# Altium PCB HBridge PCB.PcbDoc
Units mm, origin at the board's own origin, x right, y up, seen from the top; angles counter-clockwise.
Board outline 44.5 x 25.75 mm, 2 copper layers (Top Layer, Bottom Layer), stack 1.621 mm thick; 25 components, 19 nets, 79 pads, 45 vias.
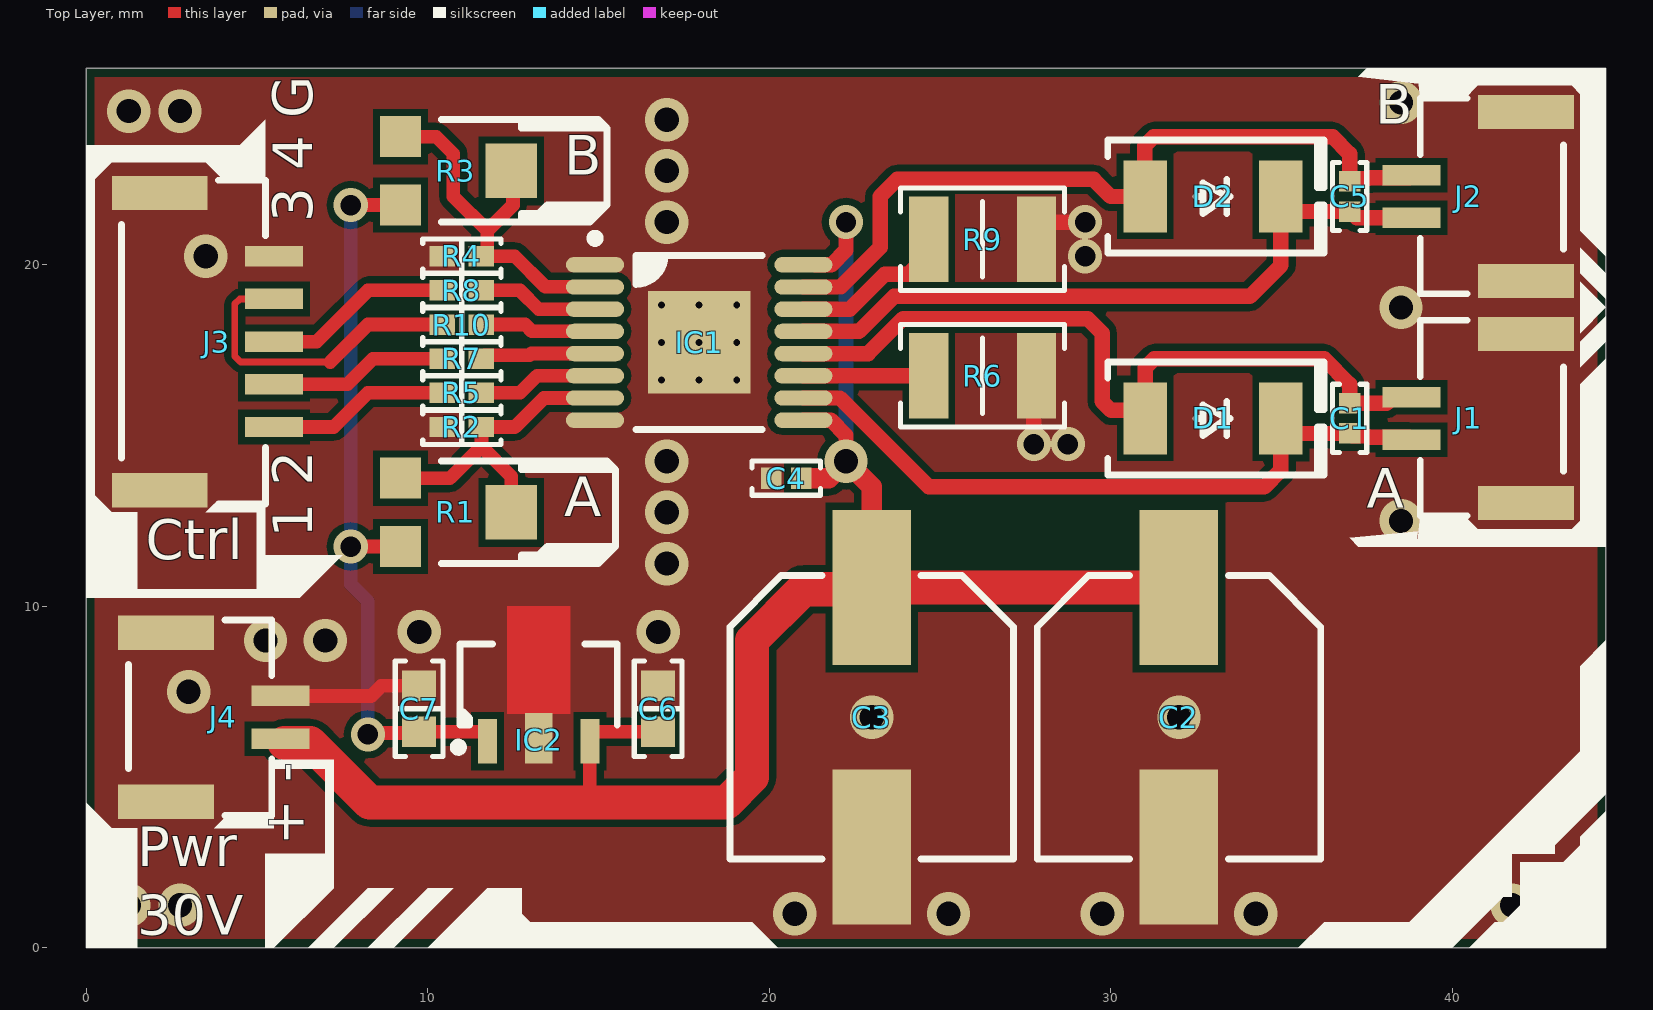
[diagram p0: Top Layer view]
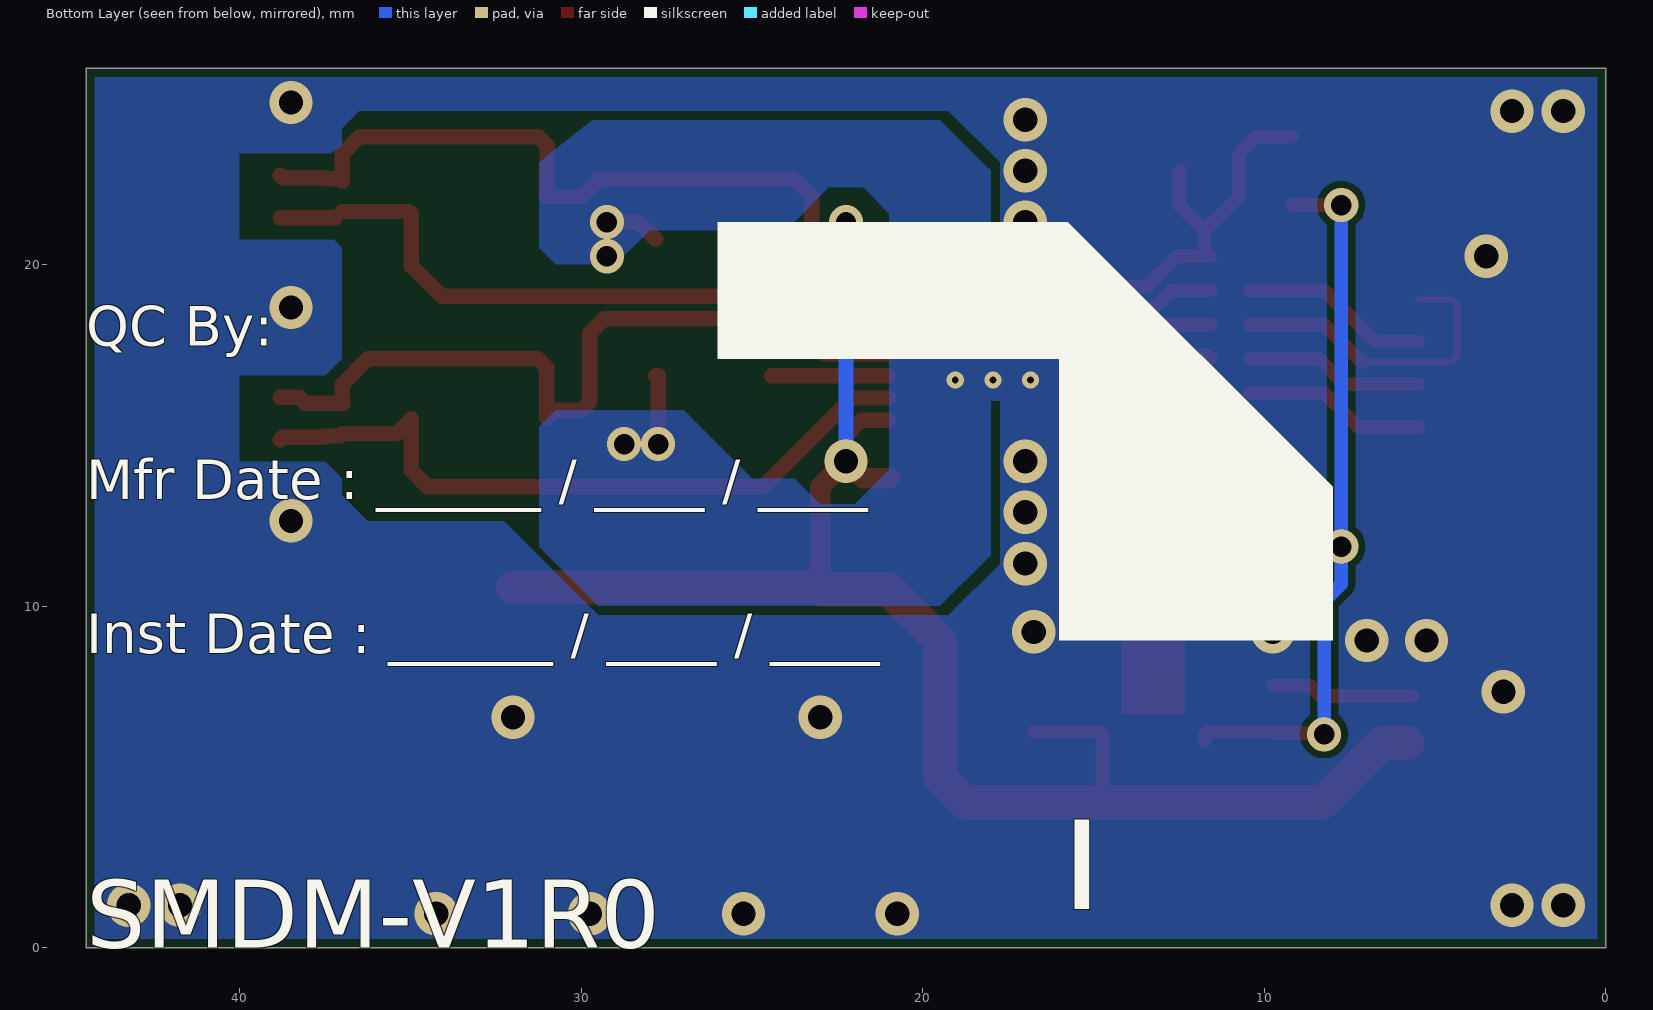
[diagram p1: Bottom Layer view, seen from below]

## Layer stack, top to bottom
Top Solder: solder mask 0.0102, Solder Resist, Dk 3.5
Top Layer: signal copper 0.0356
Dielectric1: core 1.55, FR-4, Dk 4.8
Bottom Layer: signal copper 0.0356
Bottom Solder: solder mask 0.0102, Solder Resist, Dk 3.5

## Board outline
0,0 44.5,0 44.5,25.75 0,25.75

## Design rules (kind name [scope] priority, off if disabled: settings)
BoardOutlineClearance [All] p1: gap=0.254 ignorepadtopadclearanceinfootprint=FALSE except(0: Arc-SplitContinuation Track-SplitContinuation SMDPad-SplitContinuation THPad-SplitContinuation Via-SplitContinuation Fill-SplitContinuation Poly-SplitContinuation Region-SplitContinuation Text-SplitContinuation)
Clearance PadClearance [IsPad vs IsPad] p1: gap=0.2 ignorepadtopadclearanceinfootprint=FALSE except(0: Arc-Hole Track-Hole SMDPad-Hole THPad-Hole Via-Hole Fill-Hole Poly-Hole Region-Hole Text-Hole)
Clearance [All] p2: gap=0.2 ignorepadtopadclearanceinfootprint=FALSE except(0: Arc-Hole Track-Hole SMDPad-Hole THPad-Hole Via-Hole Fill-Hole Poly-Hole Region-Hole Text-Hole)
HoleSize [All] p1: absolutevalues=TRUE maxlimit=6 minlimit=0.4 maxpercent=80.000 minpercent=20.000
HoleToHoleClearance [All] p1: gap=0.2 allowstackedmicrovias=TRUE
MinimumSolderMaskSliver [All] p1: minsoldermaskwidth=0
PolygonConnect ViaConnect [IsVia] p1: connectstyle=Direct reliefconductorwidth=0.254 reliefentries=4 polygonreliefangle="90 Angle" airgapwidth=0.254
PolygonConnect [All] p2: connectstyle=Direct reliefconductorwidth=0.3 reliefentries=4 polygonreliefangle="90 Angle" airgapwidth=0.254
RoutingVias [All] p1: holewidth=0.6 width=1 viastyle="Through Hole" minholewidth=0.4 minwidth=0.8 maxholewidth=5 maxwidth=6
SilkToSilkClearance [All] p1: silktosilkclearance=0
SilkToSolderMaskClearance SilkscreenOverComponentPads [IsPad] p1: minsilkscreentomaskgap=0.05 clearancetoexposedcopper=TRUE
SolderMaskExpansion "Via Tenting" [IsVia] p1: expansion=-2
SolderMaskExpansion [All] p2: expansion=0.102
Width [All] p1: maxlimit=2 minlimit=0.2 preferedwidth=0.4
25 further rules are at their usual default settings.

## Components (designator, comment, footprint, x,y, rotation, side; value= is the part's Value field where it differs from the comment)
C1 "100nF" "CAP 0402/1005" 37,15.5 r90 top
C2 "100uF" "CAP ALUM 8.3MM" 32,6.75 r270 top
C3 "100uF" "CAP ALUM 8.3MM" 23,6.75 r270 top
C4 "220nF" "CAP 0402/1005" 20.5,13.75 r180 top
C5 "100nF" "CAP 0402/1005" 37,22 r90 top
C6 "1uF" "CAP 0603/1608" 16.75,7 r270 top
C7 "2.2uF" "CAP 0603/1608" 9.75,7 r270 top
D1 "SMAJ36CA" "Bourns DO214AC SMA" 33,15.5 r0 top
D2 "SMAJ36CA" "Bourns DO214AC SMA" 33,22 r0 top
IC1 "Allegro A4954" "ALLEGRO TSSOP-16EP LP" 17.95,17.725 r0 top
IC2 "Diodes Inc AP7381" "DIODES INC SOT-89" 13.25,6.5 r90 top
J1 "BM02B-GHS-TBT(LF)(SN)(N)" "JST BM02B-GHS-TBT" 41.25,15.5 r270 top
J2 "BM02B-GHS-TBT(LF)(SN)(N)" "JST BM02B-GHS-TBT" 41.25,22 r270 top
J3 "BM05B-GHS-TBT(LF)(SN)" "JST BM05B-GHS-TBT" 3.063,17.75 r90 top
J4 "BM02B-PASS-TFT(LF)(SN)" "JST BM02B-GHS-TBT" 3.25,6.75 r90 top
R1 "10kR" "POT BOURNS TRIMPOT TC33X-1" 11,12.75 r270 top
R2 "750R" "RES 0402/1005" 11,15.25 r0 top
R3 "10kR" "POT BOURNS TRIMPOT TC33X-1" 11,22.75 r270 top
R4 "750R" "RES 0402/1005" 11,20.25 r0 top
R5 "33R" "RES 0402/1005" 11,16.25 r0 top
R6 "CSR1206FKR250" "STACKPOLE CSR1210" 26.25,16.75 r0 top
R7 "33R" "RES 0402/1005" 11,17.25 r0 top
R8 "33R" "RES 0402/1005" 11,19.25 r0 top
R9 "CSR1206FKR250" "STACKPOLE CSR1210" 26.25,20.75 r0 top
R10 "33R" "RES 0402/1005" 11,18.25 r0 top

## Footprints (in the part's own frame and the unit in brackets; to place one, negate y for a bottom-side part, rotate by r counter-clockwise, add the part's x,y. Pads: shape width x height; smd on the part's side, far side on the other; paste and mask are expansions set on the pad)
"ALLEGRO TSSOP-16EP LP" [mm] "TSSOP, 16-Leads, Body 5.00x4.40mm, Pitch 0.65mm, Thermal Pad 3.00x3.00mm, IPC Medium Density"
  oval 1.7x0.45 smd: 1(-3.05,2.275) 2(-3.05,1.625) 3(-3.05,0.975) 4(-3.05,0.325) 5(-3.05,-0.325) 6(-3.05,-0.975) 7(-3.05,-1.625) 8(-3.05,-2.275) 9(3.05,-2.275) 10(3.05,-1.625) 11(3.05,-0.975) 12(3.05,-0.325) 13(3.05,0.325) 14(3.05,0.975) 15(3.05,1.625) 16(3.05,2.275)
  rect 3x3 smd: 17(0,0)
  silkscreen extent -3.17,-2.55 1.85,3.17, body extent -3.21,-2.5 3.21,2.5, height 1.2
"Bourns DO214AC SMA" [mm] "Molded Diode, 2-Leads, Body 4.30x2.60mm, IPC Medium Density"
  rect 1.27x2.1 smd: 1(-1.985,0) 2(1.985,0)
  silkscreen extent -3.08,-1.65 3.25,1.65, body extent -2.6,-1.37 2.6,1.37, height 2.4
"CAP 0402/1005" [mm] "Chip Capacitor, 2-Leads, Body 1.02x0.51mm, IPC Medium Density"
  rect 0.6x0.64 smd: 1(-0.44,0) 2(0.44,0)
  silkscreen extent -1,-0.5 1,0.5, body extent -0.5,-0.26 0.5,0.26, height 0.52
"CAP 0603/1608" [mm] "Chip Capacitor, 2-Leads, Body 1.60x0.80mm, IPC Medium Density"
  rect 0.9x1 smd: 1(-0.675,0) 2(0.675,0)
  silkscreen extent -1.4,-0.7 1.4,0.7, body extent -0.8,-0.41 0.8,0.41, height 0.82
"CAP ALUM 8.3MM" [mm] "Aluminum Electrolytic Capacitor, Body 8.30x8.30x10.50mm, IPC Low Density"
  rect 4.55x2.3 smd: 1(-3.8,0) 2(3.8,0)
  silkscreen extent -4.15,-4.15 4.15,4.15, body extent -4.95,-4.15 4.95,4.15, height 10.5
"DIODES INC SOT-89" [mm] "SOT89, 3-Leads, Body 4.50x2.50mm, Pitch 1.50mm, Lead Span 3.3mm, IPC Medium Density"
  rect 1.3x0.55 smd: 1(-0.45,1.5) 3(-0.45,-1.5)
  rect 1.475x0.8 smd: 2(-0.362,0)
  Top Layer region: 0.35,0.925 3.5,0.925 3.5,-0.925 0.35,-0.925
  silkscreen extent -0.75,-2.3 2.4,2.47, body extent -0.87,-2.25 3.28,2.25, height 1.5
"JST BM02B-GHS-TBT" [mm] "JST GH Series 1.25mm pitch, 4 pin top entry connector"
  rect 0.6x1.7 smd: 1(-0.625,-2.437) 2(0.625,-2.437)
  rect 1x2.8 smd: M(-2.475,0.913) M(2.475,0.913)
  silkscreen extent -2.88,-2.19 2.85,2.01, body extent -2.88,-2.99 2.87,1.96, height 4.18
"JST BM05B-GHS-TBT" [mm] "JST GH Series 1.25mm pitch, top entry connector"
  rect 0.6x1.7 smd: 1(-2.5,-2.437) 2(-1.25,-2.437) 3(0,-2.437) 4(1.25,-2.437) 5(2.5,-2.437)
  rect 1x2.8 smd: M(-4.35,0.913) M(4.35,0.913)
  silkscreen extent -4.75,-2.19 4.72,2.03, body extent -4.75,-2.92 4.75,2.03, height 4.18
"POT BOURNS TRIMPOT TC33X-1" [mm] "Bourns Trimpot TC33X-1 - Open Frame 3mm x 3.8mm x 1.2mm"
  rect 1.2x1.2 smd: 1(-1,-1.8) 3(1,-1.8)
  rect 1.6x1.5 smd: 2(0,1.45)
  silkscreen extent -1.5,-0.6 1.5,1.75, body extent -1.8,-1.91 1.8,1.95, height 1.15
"RES 0402/1005" [mm] "Chip Resistor, 2-Leads, Body 1.0x0.5mm, IPC Medium Density"
  rect 0.75x0.6 smd: 1(-0.575,0) 2(0.575,0)
  silkscreen extent -1.14,-0.51 1.14,0.51, body extent -0.5,-0.25 0.5,0.25, height 0.35
"STACKPOLE CSR1210" [mm] "Chip Resistor, 2-Leads, Body 3.1x2.6mm, IPC Medium Density"
  rect 1.15x2.5 smd: 1(-1.575,0) 2(1.575,0)
  silkscreen extent -2.4,-1.5 2.4,1.5, body extent -1.6,-1.3 1.6,1.3, height 0.55

## Part data
C1 C5: library part Capacitor, "SMT Capacitor", Case/Package=0402, Case Code (Metric)=1005, Dielectric=X7R, Manufacturer 1=Samsung, Manufacturer Part Number 1=CL05B104KO5NFNC, Max Operating Temperature=125°C, Min Operating Temperature=-55°C, Package Quantity=1, Supplier Part Number 1=1276-1508-1-ND, Tolerance=10%, Voltage Rating=16V, Capacitance=100nF, Case Code (Imperial)=0402, ComponentLink1Description=https://datasheet.ciiva.com/25767/cl05b104ko5nfnc-25767124.pdf?src-supplier=Digi-Key, ComponentLink1URL=https://datasheet.ciiva.com/25767/cl05b104ko5nfnc-25767124.pdf?src-supplier=Digi-Key, Depth=0.5mm, Height=0.5mm, Length=1mm, Mount="Surface Mount", Packaging="Tape and Reel", Pricing 1="1=0.10000, 10=0.02400, 100=0.01060, 500=0.00760, 1000=0.00597, 2500=0.00542, 5000=0.00499 (USD)", Radiation Hardening=No, RoHS=Yes, Stock 1=1111422, Supplier 1=Digi-Key, Thickness=0.022inch, Width=0.02inch
C2 C3: library part "Polarised Capacitor", "SMT Polarised Capacitor", Case/Package=Radial, Dielectric Material=Aluminium, Leakage Current=3uA, Manufacturer 1=Nichicon, Manufacturer Part Number 1=UWT1H101MNL1GS, Max Operating Temperature=105°C, Min Operating Temperature=-55°C, Package Quantity=500, Ripple Current=140mA, Supplier Part Number 1=493-2226-1-ND, Tolerance=20%, Voltage=50V, Capacitance=100uF, ComponentLink1Description=https://datasheet.ciiva.com/97/e-wt-97104.pdf?src-supplier=Digi-Key, ComponentLink1URL=https://datasheet.ciiva.com/97/e-wt-97104.pdf?src-supplier=Digi-Key, ComponentLink2Description=https://datasheet.ciiva.com/97/e-wt-97105.pdf?src-supplier=Digi-Key, ComponentLink2URL=https://datasheet.ciiva.com/97/e-wt-97105.pdf?src-supplier=Digi-Key, ComponentLink3Description=https://datasheet.ciiva.com/97/e-wt-97106.pdf?src-supplier=Digi-Key, ComponentLink3URL=https://datasheet.ciiva.com/97/e-wt-97106.pdf?src-supplier=Digi-Key, ComponentLink4Description=https://datasheet.ciiva.com/11776/0900766b80fa3a91-11776930.pdf?src-supplier=RSComponents, ComponentLink4URL=https://datasheet.ciiva.com/11776/0900766b80fa3a91-11776930.pdf?src-supplier=RSComponents, ComponentLink5Description=https://datasheet.ciiva.com/5362/e-wt-30307-5362773.pdf?src-supplier=Mouser, ComponentLink5URL=https://datasheet.ciiva.com/5362/e-wt-30307-5362773.pdf?src-supplier=Mouser, ComponentLink6Description=https://datasheet.ciiva.com/11686/e-wt-11686889.pdf?src-supplier=Avnet, ComponentLink6URL=https://datasheet.ciiva.com/11686/e-wt-11686889.pdf?src-supplier=Avnet, ComponentLink7Description=https://datasheet.ciiva.com/28458/1910938-28458459.pdf?src-supplier=Element14, ComponentLink7URL=https://datasheet.ciiva.com/28458/1910938-28458459.pdf?src-supplier=Element14, ComponentLink8Description=https://datasheet.ciiva.com/16502/e-wt-16502940.pdf?src-supplier=Future+Electronics, ComponentLink8URL=https://datasheet.ciiva.com/16502/e-wt-16502940.pdf?src-supplier=Future+Electronics, ComponentLink9Description=https://datasheet.ciiva.com/7781/e-wt-7781807.pdf?src-supplier=Element14, ComponentLink9URL=https://datasheet.ciiva.com/7781/e-wt-7781807.pdf?src-supplier=Element14, ComponentLink10Description=https://datasheet.ciiva.com/17527/e-wt-17527183.pdf?src-supplier=Avnet+Europe, ComponentLink10URL=https://datasheet.ciiva.com/17527/e-wt-17527183.pdf?src-supplier=Avnet+Europe, Diameter=8mm, Dissipation Factor=0.14%, Height=10mm, Height - Seated (Max)=0.413inch, Lead Free="Lead Free", Length=10mm, Life (Hours)=1000Hour, Mount="Surface Mount", Number of Pins=2, Packaging="Tape and Reel", Pricing 1="1=0.48000, 10=0.34100, 100=0.22440 (USD)", Radiation Hardening=No, REACH SVHC="No SVHC", Ripple Current (AC)=140mA, RoHS=Yes, Stock 1=229777, Supplier 1=Digi-Key, Termination=SMD/SMT, Voltage Rating=50V, Voltage Rating (DC)=50V
C4: library part Capacitor, "SMT Capacitor", Case/Package=0402, Case Code (Metric)=1005, Dielectric=X5R, Manufacturer 1="Taiyo Yuden", Manufacturer Part Number 1=UMK105BJ224KV-F, Max Operating Temperature=85°C, Min Operating Temperature=-55°C, Package Quantity=10000, Supplier Part Number 1=587-3500-1-ND, Tolerance=10%, Voltage Rating=50V, Capacitance=220nF, Case Code (Imperial)=0402, ComponentLink1Description=https://datasheet.ciiva.com/24495/460umk105bj224kv-f-24495779.pdf?src-supplier=Onlinecomponents.com, ComponentLink1URL=https://datasheet.ciiva.com/24495/460umk105bj224kv-f-24495779.pdf?src-supplier=Onlinecomponents.com, ComponentLink2Description=https://datasheet.ciiva.com/30112/713umk105bj224kv-f-30112478.pdf?src-supplier=Onlinecomponents.com, ComponentLink2URL=https://datasheet.ciiva.com/30112/713umk105bj224kv-f-30112478.pdf?src-supplier=Onlinecomponents.com, ComponentLink3Description=https://datasheet.ciiva.com/18697/mlcc-all-e-18697509.pdf?src-supplier=Digi-Key, ComponentLink3URL=https://datasheet.ciiva.com/18697/mlcc-all-e-18697509.pdf?src-supplier=Digi-Key, Halogen Free="Halogen Free", Height=0.5mm, Lead Free="Lead Free", Length=0.039inch, Mount="Surface Mount", Packaging="Tape and Reel", Pricing 1="1=0.21000, 10=0.14000, 100=0.07110, 500=0.04868, 1000=0.04306, 2500=0.04119, 5000=0.03744 (USD)", RoHS=Yes, Stock 1=571795, Supplier 1=Digi-Key, Termination=SMD/SMT, Thickness=0.022inch, Voltage Rating (DC)=50V, Width=0.02inch
C6: library part Capacitor, "SMT Capacitor", Case/Package=0603, Case Code (Metric)=1608, Dielectric=X5R, Manufacturer 1=Samsung, Manufacturer Part Number 1=CL10A105KB8NNNC, Max Operating Temperature=85°C, Min Operating Temperature=-55°C, Package Quantity=1, Supplier Part Number 1=1276-1860-1-ND, Tolerance=10%, Voltage Rating=50V, Capacitance=1uF, Case Code (Imperial)=0603, ComponentLink1Description=https://datasheet.ciiva.com/26877/getdatasheetpartid-753736-26877879.pdf?src-supplier=Verical, ComponentLink1URL=https://datasheet.ciiva.com/26877/getdatasheetpartid-753736-26877879.pdf?src-supplier=Verical, Contact Plating=Tin, Depth=0.8mm, Length=1.6mm, Mount="Surface Mount", Packaging="Tape and Reel", Pricing 1="1=0.17000, 10=0.12100, 100=0.05680, 500=0.03982, 1000=0.03297 (USD)", Radiation Hardening=No, RoHS=Yes, Stock 1=1648884, Supplier 1=Digi-Key, Termination=Wraparound, Thickness=0.035inch, Width=0.031inch
C7: library part Capacitor, "SMT Capacitor", Case/Package=0603, Case Code (Metric)=1608, Dielectric=X5R, Manufacturer 1=Samsung, Manufacturer Part Number 1=CL10A225KP8NNNC, Max Operating Temperature=85°C, Min Operating Temperature=-55°C, Package Quantity=1, Supplier Part Number 1=1276-1085-1-ND, Tolerance=10%, Voltage=10V, Capacitance=2.2uF, Case Code (Imperial)=0603, ComponentLink1Description=https://datasheet.ciiva.com/25799/cl10a225kp8nnnc-25799697.pdf?src-supplier=Digi-Key, ComponentLink1URL=https://datasheet.ciiva.com/25799/cl10a225kp8nnnc-25799697.pdf?src-supplier=Digi-Key, ComponentLink2Description=https://datasheet.ciiva.com/26838/getdatasheetpartid-358617-26838359.pdf?src-supplier=Verical, ComponentLink2URL=https://datasheet.ciiva.com/26838/getdatasheetpartid-358617-26838359.pdf?src-supplier=Verical, ComponentLink3Description=https://datasheet.ciiva.com/29198/457945-da-01-en-vs-kondensator-0603-29198592.pdf?src-supplier=Conrad, ComponentLink3URL=https://datasheet.ciiva.com/29198/457945-da-01-en-vs-kondensator-0603-29198592.pdf?src-supplier=Conrad, Depth=0.8mm, Height=0.8mm, Lead Free="Lead Free", Length=1.6mm, Material=Ceramic, Mount="Surface Mount", Packaging="Tape and Reel", Pricing 1="1=0.10000, 10=0.07600, 100=0.03400, 500=0.02426, 1000=0.01906 (USD)", Radiation Hardening=No, RoHS=Yes, Stock 1=239176, Supplier 1=Digi-Key, Thickness=0.035inch, Voltage Rating=10V, Voltage Rating (DC)=10V, Width=0.031inch
D1 D2: library part "Diode Zener Bidirectional", "Bidirectional Zener Diode", Breakdown Voltage=44.2V, Case/Package=SMA, Clamping Voltage=58.1V, Leakage Current=5uA, Manufacturer 1=Bourns, Max Operating Temperature=150°C, Max Power Dissipation=400W, Max Surge Current=40A, Min Breakdown Voltage=40V, Min Operating Temperature=-55°C, Operating Supply Voltage=3.5V, Package Quantity=1, Peak Pulse Current=6.9A, Power Line Protection=No, Reverse Standoff Voltage=36V, Supplier Part Number 1=SMAJ36CABCT-ND, Test Current=1mA, ComponentLink1Description=https://datasheet.ciiva.com/25624/0900766b8112213b-25624856.pdf?src-supplier=RSComponents, ComponentLink1URL=https://datasheet.ciiva.com/25624/0900766b8112213b-25624856.pdf?src-supplier=RSComponents, ComponentLink2Description=https://datasheet.ciiva.com/17413/smaj-17413531.pdf?src-supplier=Avnet+Europe, ComponentLink2URL=https://datasheet.ciiva.com/17413/smaj-17413531.pdf?src-supplier=Avnet+Europe, ComponentLink3Description=https://datasheet.ciiva.com/8031/1695388-8031055.pdf?src-supplier=Element14, ComponentLink3URL=https://datasheet.ciiva.com/8031/1695388-8031055.pdf?src-supplier=Element14, ComponentLink4Description=https://datasheet.ciiva.com/334/smaj-334464.pdf?src-supplier=Digi-Key, ComponentLink4URL=https://datasheet.ciiva.com/334/smaj-334464.pdf?src-supplier=Digi-Key, ComponentLink5Description=https://datasheet.ciiva.com/3021/smaj-3021395.pdf?src-supplier=Avnet, ComponentLink5URL=https://datasheet.ciiva.com/3021/smaj-3021395.pdf?src-supplier=Avnet, ComponentLink6Description=https://datasheet.ciiva.com/3022/smaj-3022260.pdf?src-supplier=Avnet, ComponentLink6URL=https://datasheet.ciiva.com/3022/smaj-3022260.pdf?src-supplier=Avnet, ComponentLink7Description=https://datasheet.ciiva.com/8031/smaj-8031146.pdf?src-supplier=Element14, ComponentLink7URL=https://datasheet.ciiva.com/8031/smaj-8031146.pdf?src-supplier=Element14, ComponentLink8Description=https://datasheet.ciiva.com/8031/smaj-8031147.pdf?src-supplier=Element14, ComponentLink8URL=https://datasheet.ciiva.com/8031/smaj-8031147.pdf?src-supplier=Element14, ComponentLink9Description=https://datasheet.ciiva.com/334/smaj-334462.pdf?src-supplier=Digi-Key, ComponentLink9URL=https://datasheet.ciiva.com/334/smaj-334462.pdf?src-supplier=Digi-Key, ComponentLink10Description=https://datasheet.ciiva.com/334/smaj-334463.pdf?src-supplier=Digi-Key, ComponentLink10URL=https://datasheet.ciiva.com/334/smaj-334463.pdf?src-supplier=Digi-Key, ComponentLink11Description=https://datasheet.ciiva.com/16237/smaj-16237407.pdf?src-supplier=Onlinecomponents.com, ComponentLink11URL=https://datasheet.ciiva.com/16237/smaj-16237407.pdf?src-supplier=Onlinecomponents.com, Composition=Zener, Direction=Bidirectional, Element Configuration=Single, ESD Protection=Yes, Height=2.42mm, Length=4.57mm, Manufacturer Part Number 1=SMAJ36CA, Max Breakdown Voltage=44.2V, Max Reverse Leakage Current=5uA, Mount="Surface Mount", Number of Bidirectional Channels=1, Number of Channels=1, Number of Elements=1, Number of Pins=2, Packaging="Tape and Reel", Peak Pulse Power=400W, Polarity=Bidirectional, Pricing 1="1=0.47000, 10=0.35100, 25=0.31600, 100=0.21840, 250=0.18392, 500=0.14944, 1000=0.11496, 2500=0.10346 (USD)", Radiation Hardening=No, REACH SVHC="No SVHC", Reverse Breakdown Voltage=40V, RoHS=Yes, Stock 1=7267, Supplier 1=Digi-Key, Termination=SMD/SMT, Width=2.92mm
IC1: Case/Package=TSSOP, Manufacturer 1="Allegro MicroSystems", Manufacturer Part Number 1=A4954ELPTR-T, Max Operating Temperature=85°C, Max Supply Voltage=40V, Min Operating Temperature=-40°C, Min Supply Voltage=8V, Output Current=1.5A, Package Quantity=1, Supplier Part Number 1=620-1384-1-ND, ComponentLink1Description=https://datasheet.ciiva.com/8199/a4954-datasheet-8199653.pdf?src-supplier=Avnet, ComponentLink1URL=https://datasheet.ciiva.com/8199/a4954-datasheet-8199653.pdf?src-supplier=Avnet, ComponentLink2Description=https://datasheet.ciiva.com/17233/a4954-datasheet-17233770.pdf?src-supplier=Avnet+Europe, ComponentLink2URL=https://datasheet.ciiva.com/17233/a4954-datasheet-17233770.pdf?src-supplier=Avnet+Europe, Lead Free="Lead Free", Mount="Surface Mount", Number Of Outputs=2, Packaging="Tape and Reel", Pricing 1="1=2.84000, 10=2.54900, 25=2.41040, 100=2.08880, 250=1.98172, 500=1.77820, 1000=1.49968 (USD)", RoHS=Yes, Stock 1=59866, Supplier 1=Digi-Key
IC2: "150mA Low quiescent current fast transient low drop out linear regulator", Manufacturer 1=Diodes, Manufacturer Part Number 1=AP7381-33Y-13, Supplier Part Number 1=AP7381-33Y-13DICT-ND, ComponentLink1Description=https://www.diodes.com/assets/Datasheets/AP7381.pdf?src-supplier=Digi-Key, ComponentLink1URL=https://www.diodes.com/assets/Datasheets/AP7381.pdf?src-supplier=Digi-Key, Pricing 1="1=0.44000, 10=0.32900, 100=0.20480, 500=0.14014, 1000=0.10780 (USD)", RoHS=No, Stock 1=11928, Supplier 1=Digi-Key
J1 J2: library part "2 Pin", Color=Natural, Manufacturer 1=JST, Supplier Part Number 1=455-1578-1-ND, ComponentLink1Description=http://www.jst-mfg.com/product/pdf/eng/eGH.pdf?src-supplier=Digi-Key, ComponentLink1URL=http://www.jst-mfg.com/product/pdf/eng/eGH.pdf?src-supplier=Digi-Key, Connector Type="Outer Shroud Contact", Contact Plating=Tin, Fastening Type=Ramp, Lead Free="Lead Free", Manufacturer Part Number 1=BM02B-GHS-TBT(LF)(SN)(N), Mount="Surface Mount", Number Of Positions=2, Number Of Rows=1, Packaging="Tape and Reel", Pitch=0.049inch, Pricing 1="1=0.43000, 10=0.40500, 100=0.28330, 500=0.24284, 1000=0.20236 (USD)", RoHS=Yes, Stock 1=70745, Supplier 1=Digi-Key, Termination=Solder
J3: library part "5 Pin", Case/Package=SMD/SMT, Color=Natural, Current Rating=1A, Manufacturer 1=JST, Manufacturer Part Number 2=BM05B-GHS-TBT(LF)(SN)(N), Supplier Part Number 1=7521778, Voltage Rating=50V, ComponentLink1Description=https://datasheet.ciiva.com/25617/0900766b810cef17-25617254.pdf?src-supplier=RSComponents, ComponentLink1URL=https://datasheet.ciiva.com/25617/0900766b810cef17-25617254.pdf?src-supplier=RSComponents, ComponentLink2Description=https://datasheet.ciiva.com/16419/egh-16419225.pdf?src-supplier=Future+Electronics, ComponentLink2URL=https://datasheet.ciiva.com/16419/egh-16419225.pdf?src-supplier=Future+Electronics, ComponentLink3Description=http://www.jst-mfg.com/product/pdf/eng/eGH.pdf?src-supplier=Digi-Key, ComponentLink3URL=http://www.jst-mfg.com/product/pdf/eng/eGH.pdf?src-supplier=Digi-Key, ComponentLink4Description=http://www.jst-mfg.com/product/pdf/eng/eGH.pdf?src-supplier=Arrow, ComponentLink4URL=http://www.jst-mfg.com/product/pdf/eng/eGH.pdf?src-supplier=Arrow, ComponentLink5Description=http://www.jst-mfg.com/product/pdf/eng/eGH.pdf?src-supplier=Verical, ComponentLink5URL=http://www.jst-mfg.com/product/pdf/eng/eGH.pdf?src-supplier=Verical, Connector Type="Outer Shroud Contact", Contact Material=Bronze, Contact Plating=Tin, Fastening Type=Ramp, Housing Color=Natural, Housing Material=Nylon, Lead Free="Lead Free", Manufacturer 2=JST, Manufacturer Part Number 1=BM05B-GHS-TBT(LF)(SN), Mount="Surface Mount", Number of Contacts=5, Number of Pins=5, Number Of Positions=5, Number Of Rows=1, Orientation=Straight, Packaging="Cut Tape", Pitch=1.25mm, Pricing 1="5=0.45000, 125=0.32200, 500=0.28800, 2500=0.26800, 5000=0.25400 (GBP)", Pricing 2="1=0.46000, 10=0.43200, 100=0.33110, 500=0.28792, 1000=0.23753 (USD)", REACH SVHC="No SVHC", RoHS=Yes, Stock 1=460, Stock 2=19737, Supplier 1=RSComponents, Supplier 2=Digi-Key, Supplier Part Number 2=455-1581-1-ND, Termination=Solder
J4: library part "2 Pin", Case/Package=SMD/SMT, Color=Beige, Manufacturer 1=JST, Supplier Part Number 1=BM02B-PASS-TFT(LF)(SN)-CUTT, ComponentLink1Description=http://www1.futureelectronics.com/doc/JST/BM02B-PASS-TFT(LF)(SN).pdf?src-supplier=Future+Electronics, ComponentLink1URL=http://www1.futureelectronics.com/doc/JST/BM02B-PASS-TFT(LF)(SN).pdf?src-supplier=Future+Electronics, ComponentLink2Description=http://www.jst-mfg.com/product/pdf/eng/ePA-F.pdf?src-supplier=Digi-Key, ComponentLink2URL=http://www.jst-mfg.com/product/pdf/eng/ePA-F.pdf?src-supplier=Digi-Key, Contact Material=Copper, Gender=Male, Lead Free="Lead Free", Manufacturer Part Number 1=BM02B-PASS-TFT(LF)(SN), Number Of Positions=2, Pitch=2mm, Pricing 1="1=0.90000, 25=0.70000, 50=0.66500, 100=0.63000, 250=0.58500 (USD)", RoHS=Yes, Stock 1=290894, Supplier 1="Future Electronics", Termination=Crimp
R1 R3: library part Potentiometer, "Potentiometer", Manufacturer 1=Bourns, Manufacturer Part Number 1=TC33X-1-103E, Max Operating Temperature=100°C, Max Power Dissipation=100mW, Min Operating Temperature=-40°C, Package Quantity=2500, Supplier Part Number 1=TC33X-1-103ECT-ND, Temperature Coefficient=250ppm/°C, Tolerance=25%, ComponentLink1Description=https://datasheet.ciiva.com/17562/tc33-17562453.pdf?src-supplier=Avnet+Europe, ComponentLink1URL=https://datasheet.ciiva.com/17562/tc33-17562453.pdf?src-supplier=Avnet+Europe, ComponentLink2Description=https://datasheet.ciiva.com/2159/tc33-2159804.pdf?src-supplier=Digi-Key, ComponentLink2URL=https://datasheet.ciiva.com/2159/tc33-2159804.pdf?src-supplier=Digi-Key, Composition=Cermet, Depth=3.8mm, Height=0.047inch, Length=3mm, Military Standard=Not, Mount="Surface Mount", Packaging="Tape and Reel", Power Rating=100mW, Pricing 1="1=0.28000, 10=0.27700, 25=0.25040, 50=0.23880, 100=0.23100, 250=0.21560, 500=0.19636, 1000=0.17710 (USD)", Resistance=10kR, RoHS=Yes, Stock 1=60149, Supplier 1=Digi-Key, Termination="Foot Print", Width=0.118inch
R2 R4: library part Resistor, "SMT Resistor", Case/Package=0402, Case Code (Metric)=1005, Manufacturer 1=Panasonic, Manufacturer Part Number 1=ERJ2RKF7500X, Max Operating Temperature=155°C, Max Power Dissipation=100mW, Min Operating Temperature=-55°C, Package Quantity=10000, Supplier Part Number 1=63W0663, Temperature Coefficient=100ppm/°C, Tolerance=1%, Voltage Rating=50V, Case Code (Imperial)=0402, ComponentLink1Description=https://datasheet.ciiva.com/9180/aoa0000ce2-9180085.pdf?src-supplier=Avnet, ComponentLink1URL=https://datasheet.ciiva.com/9180/aoa0000ce2-9180085.pdf?src-supplier=Avnet, ComponentLink2Description=https://datasheet.ciiva.com/28676/1678782-28676646.pdf?src-supplier=Element14, ComponentLink2URL=https://datasheet.ciiva.com/28676/1678782-28676646.pdf?src-supplier=Element14, ComponentLink3Description=https://datasheet.ciiva.com/28565/1678782-28565079.pdf?src-supplier=Element14, ComponentLink3URL=https://datasheet.ciiva.com/28565/1678782-28565079.pdf?src-supplier=Element14, ComponentLink4Description=https://datasheet.ciiva.com/30202/aoa0000ce2-30202551.pdf?src-supplier=Onlinecomponents.com, ComponentLink4URL=https://datasheet.ciiva.com/30202/aoa0000ce2-30202551.pdf?src-supplier=Onlinecomponents.com, Composition="Thick Film", Contact Plating=Tin, Depth=0.5mm, Features="Automotive AEC-Q200", Height=0.35mm, Lead Free="Lead Free", Length=1mm, Military Standard=Not, Mount="Surface Mount", Number of Terminations=2, Packaging="Tape and Reel", Power Rating=100mW, REACH SVHC="No SVHC", Resistance=750R, RoHS=Yes, Stock 1=0, Supplier 1=Newark, Termination=SMD/SMT, Voltage Rating (DC)=50V, Width=0.02inch
R5 R7 R8 R10: library part Resistor, "SMT Resistor", Case/Package=0402, Case Code (Metric)=1005, Manufacturer 1=Panasonic, Manufacturer Part Number 1=ERJ-2GEJ330X, Max Operating Temperature=155°C, Max Power Dissipation=100mW, Min Operating Temperature=-55°C, Package Quantity=1, Supplier Part Number 1=P33JCT-ND, Temperature Coefficient=200ppm/°C, Tolerance=5%, Voltage Rating=50V, Case Code (Imperial)=0402, ComponentLink1Description=https://datasheet.ciiva.com/11821/0900766b80f806dd-11821291.pdf?src-supplier=RSComponents, ComponentLink1URL=https://datasheet.ciiva.com/11821/0900766b80f806dd-11821291.pdf?src-supplier=RSComponents, ComponentLink2Description=https://datasheet.ciiva.com/39121/1986916-39121637.pdf?src-supplier=Jameco, ComponentLink2URL=https://datasheet.ciiva.com/39121/1986916-39121637.pdf?src-supplier=Jameco, ComponentLink3Description=https://datasheet.ciiva.com/43460/1500035-43460357.pdf?src-supplier=Farnell, ComponentLink3URL=https://datasheet.ciiva.com/43460/1500035-43460357.pdf?src-supplier=Farnell, ComponentLink4Description=https://datasheet.ciiva.com/46374/1500035-46374021.pdf?src-supplier=Element14, ComponentLink4URL=https://datasheet.ciiva.com/46374/1500035-46374021.pdf?src-supplier=Element14, ComponentLink5Description=https://datasheet.ciiva.com/16522/aoa0000ce1-16522983.pdf?src-supplier=Avnet+Asia, ComponentLink5URL=https://datasheet.ciiva.com/16522/aoa0000ce1-16522983.pdf?src-supplier=Avnet+Asia, ComponentLink6Description=https://datasheet.ciiva.com/9190/aoa0000ce1-9190504.pdf?src-supplier=Avnet, ComponentLink6URL=https://datasheet.ciiva.com/9190/aoa0000ce1-9190504.pdf?src-supplier=Avnet, ComponentLink7Description=https://datasheet.ciiva.com/16449/aoa0000ce1-16449547.pdf?src-supplier=Future+Electronics, ComponentLink7URL=https://datasheet.ciiva.com/16449/aoa0000ce1-16449547.pdf?src-supplier=Future+Electronics, ComponentLink8Description=https://datasheet.ciiva.com/28547/1678796-28547165.pdf?src-supplier=Element14, ComponentLink8URL=https://datasheet.ciiva.com/28547/1678796-28547165.pdf?src-supplier=Element14, ComponentLink9Description=https://datasheet.ciiva.com/28686/1678796-28686909.pdf?src-supplier=Element14, ComponentLink9URL=https://datasheet.ciiva.com/28686/1678796-28686909.pdf?src-supplier=Element14, ComponentLink10Description=https://datasheet.ciiva.com/48530/aoa0000ce1-48530957.pdf?src-supplier=Avnet, ComponentLink10URL=https://datasheet.ciiva.com/48530/aoa0000ce1-48530957.pdf?src-supplier=Avnet, ComponentLink11Description=https://datasheet.ciiva.com/16784/70260739-16784442.pdf?src-supplier=Allied+Electronics, ComponentLink11URL=https://datasheet.ciiva.com/16784/70260739-16784442.pdf?src-supplier=Allied+Electronics, ComponentLink12Description=https://datasheet.ciiva.com/30205/4aoa0000ce1-30205131.pdf?src-supplier=Onlinecomponents.com, ComponentLink12URL=https://datasheet.ciiva.com/30205/4aoa0000ce1-30205131.pdf?src-supplier=Onlinecomponents.com, ComponentLink13Description=https://datasheet.ciiva.com/46386/1500035-46386748.pdf?src-supplier=Element14, ComponentLink13URL=https://datasheet.ciiva.com/46386/1500035-46386748.pdf?src-supplier=Element14, ComponentLink14Description=https://datasheet.ciiva.com/5917/1500035-5917807.pdf?src-supplier=Farnell, ComponentLink14URL=https://datasheet.ciiva.com/5917/1500035-5917807.pdf?src-supplier=Farnell, Composition="Thick Film", Contact Plating=Tin, Depth=0.5mm, Features="Automotive AEC-Q200", Height=0.35mm, Lead Free="Lead Free", Length=1mm, Military Standard=Not, Mount="Surface Mount", Number of Terminations=2, Packaging="Tape and Reel", Power Rating=100mW, Pricing 1="1=0.10000, 10=0.03100, 100=0.01250, 1000=0.00560, 2500=0.00486, 5000=0.00401 (USD)", Radiation Hardening=No, REACH SVHC="No SVHC", Resistance=33R, RoHS=Yes, Stock 1=2284531, Supplier 1=Digi-Key, Termination=SMD/SMT, Voltage Rating (DC)=50V, Width=0.02inch
R6 R9: library part Resistor, "SMT Resistor", Case/Package=1206, Case Code (Metric)=3216, Manufacturer 1="Stackpole Electronics", Max Operating Temperature=155°C, Max Power Dissipation=500mW, Min Operating Temperature=-55°C, Resistance=250mR, Supplier Part Number 1=CSR1206FKR250CT-ND, Temperature Coefficient=100ppm/°C, Tolerance=1%, Case Code (Imperial)=1206, ComponentLink1Description=https://www.seielect.com/catalog/SEI-Packaging.pdf?src-supplier=Digi-Key, ComponentLink1URL=https://www.seielect.com/catalog/SEI-Packaging.pdf?src-supplier=Digi-Key, ComponentLink2Description=https://www.seielect.com/catalog/SEI-CSR_CSRN.pdf?src-supplier=Avnet+Asia, ComponentLink2URL=https://www.seielect.com/catalog/SEI-CSR_CSRN.pdf?src-supplier=Avnet+Asia, Composition="Thick Film", Contact Plating=Tin,Matte, Height=0.026inch, Lead Free="Lead Free", Length=0.12inch, Manufacturer Part Number 1=CSR1206FKR250, Mount="Surface Mount", Number of Terminations=2, Packaging="Tape and Reel", Power Rating=500mW, Pricing 1="1=0.47000, 10=0.35900, 25=0.27280, 50=0.20280, 100=0.15070, 250=0.12732, 500=0.10914 (USD)", RoHS=Yes, Stock 1=6419, Supplier 1=Digi-Key, Termination=Wraparound, Width=0.061inch

## Via types
v1: diameter 1.27, hole 0.711, Top Layer to Bottom Layer, 28 vias
v2: diameter 0.5, hole 0.2, Top Layer to Bottom Layer, 9 vias
v3: diameter 1, hole 0.6, Top Layer to Bottom Layer, 8 vias

## Nets (pads, with @x,y where several pads share a name; then routed paths per layer and width w, separated by ;. In a path a pad name is that pad's centre, name@x,y a point inside that pad or via, vN(x,y) a via of type N, cw(c..) or ccw(c..) an arc to the next point about the centre after c; other vN are vias at no path point)
3V3: C7.2 IC2.1 R1.3 R3.3 | length 22.4
  Top Layer w0.4: v3(7.75,11.75) R1.3 ; v3(7.75,21.75) R3.3 ; v3(8.25,6.25) 8.287,6.288 9.713,6.288 C7.2 11.675,6.325 11.75,6.25 IC2.1
  Bottom Layer w0.4: v3(7.75,21.75) v3(7.75,11.75) 7.75,10.65 8.25,10.15 v3(8.25,6.25)
CS1: IC1.11 R6.1 | length 3.4
  Top Layer w0.45: IC1.11 R6.1@24.425,16.75
CS2: IC1.14 R9.1 | length 4.7
  Top Layer w0.45: IC1.14 22.36,18.7 23.385,19.725 24.075,19.725 24.425,20.075 R9.1@24.425,20.75
GND: C2.2 C3.2 C4.2 C6.1 C7.1 IC1.1 IC1.8 IC1.17 IC2.2 J3.5 J4.2 R2.1 R4.1 R6.2 R9.2 | length 7.9
  Top Layer w0.4: J4.2 8.35,7.375 8.65,7.675 C7.1
  Top Layer w0.45: v3(27.75,14.75) 27.75,16.75 R6.2 ; R9.2 28.325,21.25 v3(29.25,21.25)
  other v1: 20.75,1 25.25,1 29.75,1 34.25,1 1.25,1.25 2.75,1.25 41.75,1.25 43.25,1.25 23,6.75 32,6.75 3,7.5 5.25,9 7,9 9.75,9.25 16.75,9.25 17,11.25 38.5,12.5 17,12.75 17,14.25 38.5,18.75 3.5,20.25 17,21.25 17,22.75 17,24.25 1.25,24.5 2.75,24.5 38.5,24.75
  other v2: 16.85,16.625 17.95,16.625 19.05,16.625 16.85,17.725 17.95,17.725 19.05,17.725 16.85,18.825 17.95,18.825 19.05,18.825
  other v3: 28.75,14.75 29.25,20.25
H1_IN1: J3.1 R5.1 | length 5.3
  Top Layer w0.4: J3.1 7.25,15.25 8.25,16.25 R5.1
H1_IN2: J3.2 R7.1 | length 5.2
  Top Layer w0.4: J3.2 7.651,16.5 8.401,17.25 R7.1
H1_IN3: J3.3 R8.1 | length 5.5
  Top Layer w0.4: J3.3 6.75,17.75 8.25,19.25 R8.1
H1_IN4: J3.4 R10.1 | length 9.3
  Top Layer w0.2: J3.4 4.5,19 4.35,18.85 4.35,17.326 4.526,17.15 7.15,17.15
  Top Layer w0.4: 7.15,17.15 8.25,18.25 R10.1
IN1: IC1.6 R5.2 | length 3.5
  Top Layer w0.4: R5.2 12.706,16.25 13.206,16.75 IC1.6
IN2: IC1.5 R7.2 | length 3.4
  Top Layer w0.4: R7.2 11.675,17.35 12.981,17.35 13.031,17.4 IC1.5
IN3: IC1.3 R8.2 | length 3.6
  Top Layer w0.4: R8.2 12.704,19.25 13.254,18.7 IC1.3
IN4: IC1.4 R10.2 | length 3.4
  Top Layer w0.4: R10.2 12.856,18.25 13.056,18.05 IC1.4
MOT_1A: C1.1 D1.2 IC1.10 J1.2 | length 20.9
  Top Layer w0.45: IC1.10 22.076,16.1 24.676,13.5 34.5,13.5 34.985,13.985 D1.2@34.985,15.47 ; D1.2 D1.2@34.985,15.47 ; J1.2 38.738,14.95 37.55,14.95 37.515,14.985 37.075,14.985 C1.1 35.395,15.06 D1.2@34.985,15.47
MOT_1B: C1.2 D1.1 IC1.12 J1.1 | length 23.2
  Top Layer w0.45: IC1.12 22.899,17.4 23.924,18.425 29.325,18.425 29.75,18 29.75,16 30.014,15.736 30.779,15.736 D1.1 31.015,16.986 31.279,17.25 36.25,17.25 37,16.5 37,15.96 36.98,15.94 C1.2 38.078,15.94 38.263,16.125 J1.1
MOT_2A: C5.1 D2.2 IC1.13 J2.2 | length 19.9
  Top Layer w0.45: IC1.13 22.63,18.05 23.655,19.075 34.075,19.075 34.985,19.985 34.985,21.5 35.045,21.56 C5.1 ; C5.1@37.205,21.375 J2.2
MOT_2B: C5.2 D2.1 IC1.15 J2.1 | length 22.9
  Top Layer w0.45: IC1.15 22.091,19.35 23.25,20.509 23.25,22 23.75,22.5 29.5,22.5 30,22 D2.1 31,22.015 31,23.486 31.264,23.75 36.5,23.75 37,23.25 C5.2 37.075,22.515 37.515,22.515 37.55,22.55 38.738,22.55 J2.1
VCC: C2.1 C3.1 C4.1 C6.2 IC1.9 IC1.16 IC2.3 J4.1 | length 52.5
  Top Layer w0.4: 14.75,4.25 IC2.3 14.75,6.25 14.825,6.325 C6.2
  Top Layer w0.45: IC1.9 21.807,15.45 22.25,15.007 v1(22.25,14.25) ; IC1.16@21.356,20 21.822,20 22.25,20.428 v3(22.25,21.25)
  Top Layer w0.5: C4.1 20.94,13.77 C4.1@20.96,13.75
  Top Layer w0.6: C4.1@20.96,13.75 21.75,13.75 v1(22.25,14.25) 23,13.5 C3.1
  Top Layer w1: J4.1@5.812,6 6.556,6 8.306,4.25 14.75,4.25 18.75,4.25 19.5,5 19.5,9 21,10.5 22.95,10.5 C3.1 C2.1
  Bottom Layer w0.45: v1(22.25,14.25) v3(22.25,21.25)
VREF1: IC1.7 R1.1 R1.2 R2.2 | length 9.2
  Top Layer w0.4: R1.1 10.65,13.75 11.575,14.675 ; R2.2 11.575,14.675 ; R2.2@11.65,15.25 12.554,15.25 13.404,16.1 IC1.7 ; R1.2 12.45,13.8 11.575,14.675
VREF2: IC1.2 R3.1 R3.2 R4.2 | length 11
  Top Layer w0.4: R3.1 10.25,23.75 10.75,23.25 10.75,22 11.75,21 ; R4.2 R4.2@11.65,20.25 ; R3.2 12.5,22.7 12.5,21.75 11.75,21 ; IC1.2 14.897,19.353 13.45,19.353 12.553,20.25 R4.2@11.65,20.25 ; R4.2@11.65,20.25 11.75,20.35 11.75,21
pads on no net: J1.M J2.M J3.M J4.M

## Polygon pours and split planes (outlines as drawn)
GND on Bottom Layer "Bottom Layer-GND" (solid, remove dead copper, pour order 2): 0,25.75 0,0 44.5,0 44.5,25.75
GND on Top Layer "Top Layer-GND" (solid, remove dead copper, pour order 0): 0,25.75 0,0 44.5,0 44.5,25.75

## Other copper
Bottom Layer:
  pour cut-out: 17.75,16 18,16 18,11.5 19.5,10 29.5,10 31.25,11.75 31.25,15.25 30.75,15.75 30.75,18.25 37,18.25 37,17.5 37,17.25 37.5,16.75 40,16.75 40,14.25 37.5,14.25 37,13.75 37,13.25 36.25,12.5 32.25,12.5 29.5,9.75 19.25,9.75 17.75,11.25
  pour cut-out: 17.75,19.5 17.75,23 19.25,24.5 36.5,24.5 37,24 37,23.5 37.333,23.25 40,23.25 40,20.75 37.25,20.75 37,20.5 37,19 37,18.25 30.75,18.25 30.75,20 31.25,20.5 31.25,23 29.687,24.25 19.5,24.25 18,22.75 18,19.5
  pour cut-out: 21.75,22.25 21,21.5 21,14 22,13 23,13 23.75,13.75 25,13.75 27,15.75 30.75,15.75 30.75,20 29,20 28,21 24,21 22.75,22.25

## Silkscreen, mask and mechanical layers (free items; w line width, h text height)
Top Overlay:
  drawing of 49 lines, arcs and shapes, not listed
  text "B" at 37.75,23.75 h2
  text "B" at 14,22.25 h2
  text "3 4 G" at 7,21.25 h2 r90
  text "A" at 37.5,12.5 h2
  text "A" at 14,12.25 h2
  text "1 2" at 7,12 h2 r90
  text "Ctrl" at 1.75,11 h2
  text "+ -" at 6.75,3 h2 r90
  text "Pwr / 30V" at 1.5,0 h2
Bottom Overlay:
  region: 26,21.25 26,17.25 16,17.25 16,9 8,9 8,13.5 15.75,21.25
  text "QC By:" at 44.5,17.25 h2
  text "Mfr Date : ______ / ____ / ____" at 44.5,12.75 h2
  text "Inst Date : ______ / ____ / ____" at 44.5,8.25 h2
  text "i" at 16,0 h6
  text "SMDM-V1R0" at 44.5,0 h2
Outlines:
  the board outline again, w0.2